# Altium PCB PCB2.PcbDoc
Units mm, origin at the board's own origin, x right, y up, seen from the top; angles counter-clockwise.
Board outline 25 x 155 mm, 2 copper layers (Top Layer, Bottom Layer); 10 components, 36 nets, 177 pads, 0 vias.
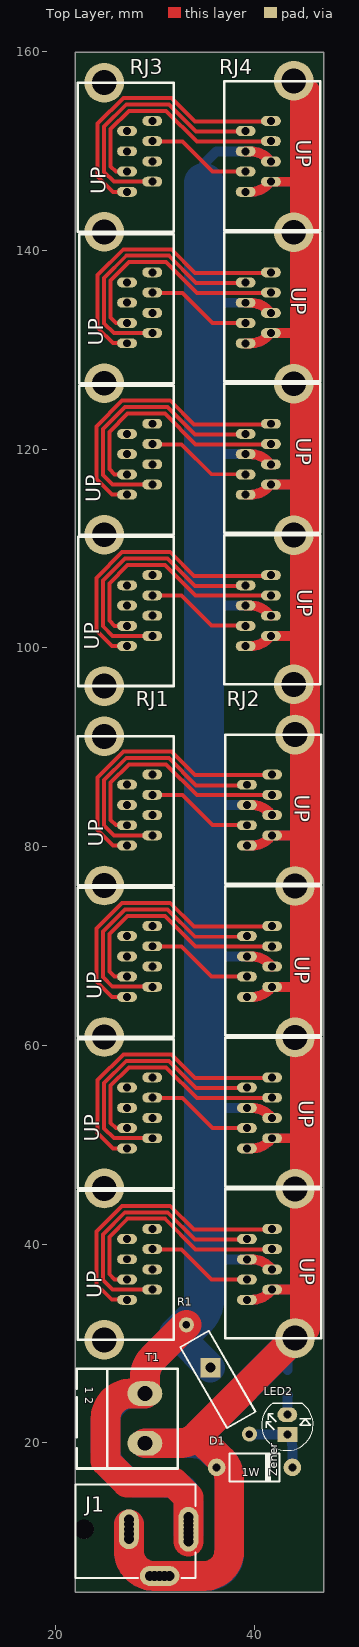
[diagram p0: Top Layer view]
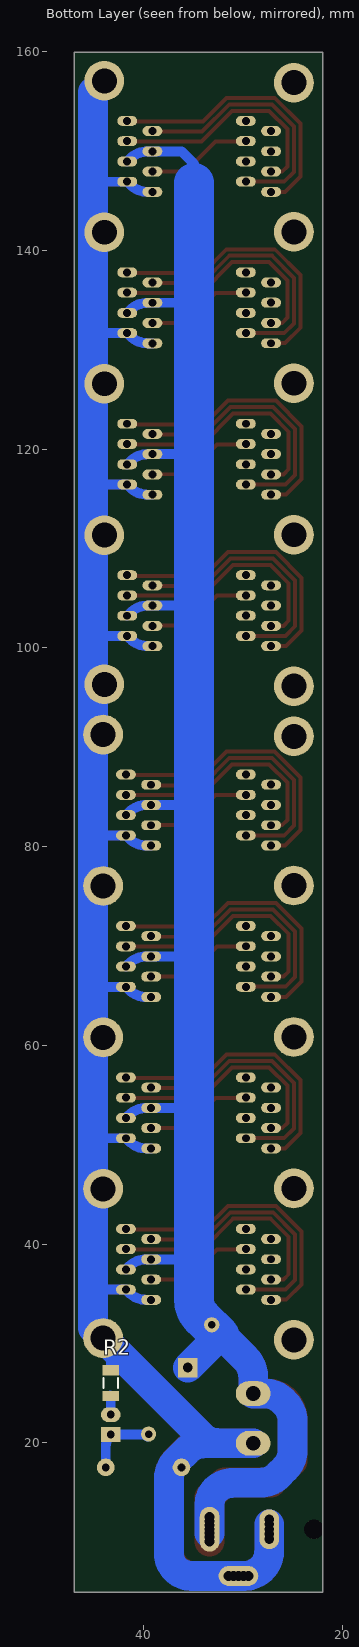
[diagram p1: Bottom Layer view, seen from below]

## Layer stack, top to bottom
Top Solder: solder mask 0.0102, Solder Resist, Dk 3.5
Top Layer: signal copper 0.0356
Dielectric 1: dielectric 0.32, FR-4, Dk 4.8
Bottom Layer: signal copper 0.0356
Bottom Solder: solder mask 0.0102, Solder Resist, Dk 3.5

## Board outline
21.99,4.95 21.99,159.95 46.99,159.95 46.99,4.95

## Design rules (kind name [scope] priority, off if disabled: settings)
Clearance [All] p1: gap=0.25 ignorepadtopadclearanceinfootprint=FALSE
PolygonConnect [All] p1: connectstyle=Relief reliefconductorwidth=0.4 reliefentries=4 polygonreliefangle="90 Angle" airgapwidth=0.254
RoutingVias [All] p1: holewidth=0.711 width=1.27 viastyle="Through Hole" minholewidth=0.711 minwidth=1.27 maxholewidth=0.711 maxwidth=1.27
SolderMaskExpansion [All] p1: expansion=0.102
Width [All] p1: maxlimit=4 minlimit=0.254 preferedwidth=1.5
30 further rules are at their usual default settings.

## Components (designator, comment, footprint, x,y, rotation, side; value= is the part's Value field where it differs from the comment)
D1 "Diode Zener" "Diode 1W" 40.005,17.526 r0 top
J1 "Power Jack" "Power Jack" 18.86,11.303 r0 top locked
LED2 "Red" LED-5mm 43.31,20.828 r90 top
R1 "330R" Res-(1/2) 33.147,31.877 r300 top
R2 "330R" "RES 1206 (3216X08L)" 43.31,27.308 r270 bottom
RJ1 "" rj45-w57-4 27.178,34.393 r90 top locked
RJ2 "" rj45-w57-4 41.783,87.249 r270 top locked
RJ3 "" rj45-w57-4 27.178,100.179 r90 top
RJ4 "" rj45-w57-4 41.656,153.035 r270 top
T1 "Phoenix terminal" "phoenix terminal 2" 17.291,27.448 r270 top

## Footprints (in the part's own frame and the unit in brackets; to place one, negate y for a bottom-side part, rotate by r counter-clockwise, add the part's x,y. Pads: shape width x height; smd on the part's side, far side on the other; paste and mask are expansions set on the pad)
"Diode 1W" [mil]
  round 70 hole 31.5: 1(-150,0) 2(150,0)
  silkscreen extent -100,-55 100,55, body extent -166,-52 165,52, height 131
LED-5mm [mm]
  rect 1.5x2 hole 0.8: 1(0,0)
  oval 1.5x2 hole 0.8: 2(2,0)
  silkscreen extent -1.6,-2.6 3.13,2.6
"phoenix terminal 2" [mm] "2 terminals"
  oval 2.5x3.5 hole 1.5: 1(2.493,11.684) 2(7.493,11.684)
  silkscreen extent 0,4.81 10.03,15
"Power Jack" [mm] "Power Adaptor Jack"
  round 1.5 hole 1: 1(14.5,-1.25) 1(14.5,-0.8) 1(14.5,-0.4) 1(14.5,0.4) 1(14.5,0.8) 1(14.5,1.25) 2(8.5,-1) 2(8.5,1) 2(8.5,-0.5) 2(8.5,0.5) 3(10.6,-4.7) 3(11.1,-4.7) 3(12.1,-4.7) 3(12.6,-4.7)
  oval 2x4.5 hole 1: 1(14.5,0)
  oval 2x4 hole 1: 2(8.5,0)
  oval 4x2 hole 1: 3(11.6,-4.7)
  round 1.9 hole 2: MH(4,0)
  silkscreen extent 3.11,-4.9 15.2,4.5, body extent 0,-4.9 15.2,4.5, height 11
"RES 1206 (3216X08L)" [mm] "Chip Resistor, 2-Leads, Body 3.2x1.6mm, IPC High Density _ (0.125 W)"
  rect 1.05x1.7 smd: 1(0,0) 2(2.596,0)
  silkscreen extent 0.8,-0.75 1.8,0.75, body extent -0.23,-0.76 2.82,0.76, height 0.6
Res-(1/2) [mil]
  round 60 hole 30: 1(0,0) 2(500,0)
  silkscreen extent 65,-65 435,65, body extent -12,-66 513,66, height 136
rj45-w57-4 [mm]
  oval 1x2 hole 0.8: 1(0,0) 2(1.02,-2.54) 3(2.04,0) 4(3.06,-2.54) 5(4.08,0) 6(5.1,-2.54) 7(6.12,0) 8(7.14,-2.54) 9(15.24,0) 10(16.26,-2.54) 11(17.28,0) 12(18.3,-2.54) 13(19.32,0) 14(20.34,-2.54) 15(21.36,0) 16(22.38,-2.54) 17(30.48,0) 18(31.5,-2.54) 19(32.52,0) 20(33.54,-2.54) 21(34.56,0) 22(35.58,-2.54) 23(36.6,0) 24(37.62,-2.54) 25(45.72,0) 26(46.74,-2.54) 27(47.76,0) 28(48.78,-2.54) 29(49.8,0) 30(50.82,-2.54) 31(51.84,0) 32(52.86,-2.54)
  round 4 hole 2.5: 33(-4.03,2.3) 34(11.21,2.3) 35(26.45,2.3) 36(41.69,2.3) 37(56.706,2.3)
  silkscreen extent -4.01,-4.7 56.71,4.95

## Part data
D1: "Zener Diode", Voltage=12V, Company=E.P.I.L, Design Date=2011/11/02, Designer="Saeid Jorablo"
LED2: library part LED, "LED", Adding Date=1387/12/22, Color=Red, Designer="Saeid Jorablo", Organazation=ControTec, Size="SMD 1206"
R1 R2: library part Resistor, "Resistor", Power="1/8 W", Tolerance=5%
RJ1 RJ2 RJ3 RJ4: library part RJ45-w57-4
T1: library part "Phoenix terminal 2", "Terminal 2 Pin", ComponentLinkURL=www.picpars.com, Designer="Seyed Mohsen Ghasemain", E-mail=picpars@gmail.com
J1: Adding Date=10/21/2009, Company=Personal, Designer="Saeid Jorablo", Project Name=Laser

## Free pads (board coordinates)
  rect 2x2 hole 1: 3(35.56,27.559)

## Nets (pads, with @x,y where several pads share a name; then routed paths per layer and width w, separated by ;. In a path a pad name is that pad's centre, name@x,y a point inside that pad or via, vN(x,y) a via of type N, cw(c..) or ccw(c..) an arc to the next point about the centre after c; other vN are vias at no path point)
GND: D1.1 J1.2 J1.3 R2.1 RJ2.7 RJ2.8 RJ2.15 RJ2.16 RJ2.23 RJ2.24 RJ2.31 RJ2.32 RJ2.33 RJ2.34 RJ2.35 RJ2.36 RJ2.37 RJ4.7 RJ4.8 RJ4.15 RJ4.16 RJ4.23 RJ4.24 RJ4.31 RJ4.32 RJ4.33 RJ4.34 RJ4.35 RJ4.36 RJ4.37 T1.2 | length 455.6
  Top Layer w1: RJ4.32 39.584,100.175 ccw(c39.584,102.715) 41.38,100.919 RJ4.31 44.72,101.195 ccw(c44.72,101.711) 45.085,101.346 ; RJ4.24 39.584,115.415 ccw(c39.584,117.955) 41.38,116.159 RJ4.23 45.027,116.435 ccw(c45.027,116.517) 45.085,116.459 ; RJ4.16 39.584,130.655 ccw(c39.584,133.195) 41.38,131.399 RJ4.15 45.027,131.675 ccw(c45.027,131.757) 45.085,131.699 ; RJ4.8 39.584,145.895 ccw(c39.584,148.435) 41.38,146.639 RJ4.7 45.027,146.915 ccw(c45.027,146.997) 45.085,146.939 ; RJ2.32 39.711,34.389 ccw(c39.711,36.929) 41.507,35.133 RJ2.31 44.836,35.409 cw(c44.836,35.057) 45.085,35.306 ; RJ2.24 39.711,49.629 ccw(c39.711,52.169) 41.507,50.373 RJ2.23 44.836,50.649 cw(c44.836,50.297) 45.085,50.546 ; RJ2.16 39.711,64.869 ccw(c39.711,67.409) 41.507,65.613 RJ2.15 44.836,65.889 cw(c44.836,65.537) 45.085,65.786 ; RJ2.8 39.711,80.109 ccw(c39.711,82.649) 41.507,80.853 RJ2.7 44.223,81.129 cw(c44.223,79.91) 45.085,80.772
  Top Layer w3: J1.2@27.36,11.803 27.36,10.803 27.36,9.143 ccw(c29.9,9.143) 29.9,6.603 29.96,6.603 30.46,6.603 30.96,6.603 31.46,6.603 34.925,6.603 ccw(c34.925,9.143) 37.465,9.143 37.465,16.421 ccw(c34.925,16.421) 36.721,18.217 34.239,20.699 ; T1.2 32.443,19.955 ccw(c32.443,22.495) 34.239,20.699 ; RJ4.33 45.085,155.936 45.085,146.939 45.085,131.699 45.085,116.459 45.085,101.346 45.085,80.772 45.085,65.786 45.085,50.546 45.085,35.306 45.085,31.545 RJ2.37 34.239,20.699
  Bottom Layer w1: RJ4.32 39.584,100.175 ccw(c39.584,102.715) 41.38,100.919 RJ4.31 44.982,101.195 45.085,101.092 ; RJ4.24 39.584,115.415 ccw(c39.584,117.955) 41.38,116.159 RJ4.23 45.061,116.435 45.085,116.459 ; RJ4.16 39.584,130.655 ccw(c39.584,133.195) 41.38,131.399 RJ4.15 44.934,131.675 45.085,131.826 ; RJ4.8 39.584,145.895 ccw(c39.584,148.435) 41.38,146.639 RJ4.7 45.061,146.915 45.085,146.939 ; RJ2.32 39.711,34.389 ccw(c39.711,36.929) 41.507,35.133 RJ2.31 44.728,35.409 45.085,35.052 ; RJ2.24 39.711,49.629 ccw(c39.711,52.169) 41.507,50.373 RJ2.23 45.061,50.649 45.085,50.673 ; RJ2.16 39.711,64.869 ccw(c39.711,67.409) 41.507,65.613 RJ2.15 44.728,65.889 45.085,65.532 ; RJ2.8 39.711,80.109 ccw(c39.711,82.649) 41.507,80.853 RJ2.7 44.934,81.129 45.085,81.28 ; R2.1 43.31,28.718 cw(c45.85,28.718) RJ2.37@44.054,30.514
  Bottom Layer w3: J1.2@27.36,11.803 27.36,10.803 27.36,9.143 ccw(c29.9,9.143) 29.9,6.603 29.96,6.603 30.46,6.603 30.96,6.603 31.46,6.603 35.178,6.603 ccw(c35.178,8.89) 37.465,8.89 37.465,16.363 ccw(c34.925,16.363) 36.721,18.159 35.669,19.211 ccw(c33.873,17.415) 33.873,19.955 32.443,19.955 ; T1.2 32.443,19.955 ; RJ4.33 45.085,155.936 45.085,146.939 45.085,131.826 45.085,116.459 45.085,101.092 45.085,81.28 45.085,65.532 45.085,50.673 45.085,35.052 45.085,31.545 RJ2.37 44.054,30.514 34.239,20.699 cw(c32.443,22.495) 32.443,19.955
NetD1_2: D1.2 LED2.1 R1.2 | length 7.2
  Bottom Layer w1: R1.2@39.624,20.624 cw(c40.115,20.133) 40.115,20.828 LED2.1 cw(c42.091,19.609) 43.815,19.609 D1.2
NetLED2_2: LED2.2 R2.2 | length 2
  Bottom Layer w1: LED2.2 R2.2 R2.2@43.363,24.765
RX+p1: RJ1.27 RJ2.3 | length 24
  Top Layer w0.4: RJ1.27@27.178,82.159 26.051,82.159 25.527,82.683 25.527,86.431 27.367,88.271 31.115,88.271 34.201,85.185 RJ2.3@41.04,85.185 ; RJ1.27@27.178,82.169 RJ1.27@27.959,82.169
RX+p2: RJ1.19 RJ2.11 | length 24
  Top Layer w0.4: RJ1.19@27.051,66.919 25.924,66.919 25.4,67.443 25.4,71.191 27.24,73.031 30.988,73.031 34.074,69.945 RJ2.11@40.913,69.945 ; RJ1.19@27.051,66.929 RJ1.19@27.832,66.929
RX+p3: RJ1.11 RJ2.19 | length 24
  Top Layer w0.4: RJ1.11@27.178,51.679 26.051,51.679 25.527,52.203 25.527,55.951 27.367,57.791 31.115,57.791 34.201,54.705 RJ2.19@41.04,54.705 ; RJ1.11@27.178,51.689 RJ1.11@27.959,51.689
RX+p4: RJ1.3 RJ2.27 | length 24
  Top Layer w0.4: RJ1.3@27.051,36.439 25.924,36.439 25.4,36.963 25.4,40.711 27.24,42.551 30.988,42.551 34.074,39.465 RJ2.27@40.913,39.465 ; RJ1.3@27.051,36.449 RJ1.3@27.832,36.449
RX+p5: RJ3.27 RJ4.3 | length 24
  Top Layer w0.4: RJ3.27 26.051,147.939 25.527,148.463 25.527,152.211 27.367,154.051 31.115,154.051 34.201,150.965 RJ4.3@41.04,150.965 ; RJ3.27@27.178,147.949 RJ3.27@27.959,147.949
RX+p6: RJ3.19 RJ4.11 | length 24
  Top Layer w0.4: RJ3.19@27.178,132.705 26.051,132.705 25.527,133.229 25.527,136.977 27.367,138.817 31.115,138.817 34.201,135.731 RJ4.11@41.04,135.731 ; RJ3.19@27.178,132.715 RJ3.19@27.959,132.715
RX+p7: RJ3.11 RJ4.19 | length 24
  Top Layer w0.4: RJ3.11@27.051,117.465 25.924,117.465 25.4,117.989 25.4,121.737 27.24,123.577 30.988,123.577 34.074,120.491 RJ4.19@40.913,120.491 ; RJ3.11@27.051,117.475 RJ3.11@27.832,117.475
RX+p8: RJ3.3 RJ4.27 | length 24
  Top Layer w0.4: RJ3.3@27.051,102.225 25.924,102.225 25.4,102.749 25.4,106.497 27.24,108.337 30.988,108.337 34.074,105.251 RJ4.27@40.913,105.251 ; RJ3.3@27.051,102.235 RJ3.3@27.832,102.235
RX-p1: RJ1.30 RJ2.6 | length 10.3
  Top Layer w0.4: RJ1.30@29.991,85.185 32.766,85.185 35.782,82.169 RJ2.6@39.008,82.169
RX-p2: RJ1.22 RJ2.14 | length 10.3
  Top Layer w0.4: RJ1.22@29.864,69.945 32.639,69.945 35.655,66.929 RJ2.14@38.881,66.929
RX-p3: RJ1.14 RJ2.22 | length 10.3
  Top Layer w0.4: RJ1.14@29.991,54.705 32.766,54.705 35.782,51.689 RJ2.22@39.008,51.689
RX-p4: RJ1.6 RJ2.30 | length 10.3
  Top Layer w0.4: RJ1.6@29.864,39.465 32.639,39.465 35.655,36.449 RJ2.30@38.881,36.449
RX-p5: RJ3.30 RJ4.6 | length 10.3
  Top Layer w0.4: RJ3.30@29.991,150.965 32.766,150.965 35.782,147.949 RJ4.6@39.008,147.949
RX-p6: RJ3.22 RJ4.14 | length 10.3
  Top Layer w0.4: RJ3.22@29.991,135.731 32.766,135.731 35.782,132.715 RJ4.14@39.008,132.715
RX-p7: RJ3.14 RJ4.22 | length 10.3
  Top Layer w0.4: RJ3.14@29.864,120.491 32.639,120.491 35.655,117.475 RJ4.22@38.881,117.475
RX-p8: RJ3.6 RJ4.30 | length 10.3
  Top Layer w0.4: RJ3.6@29.864,105.251 32.639,105.251 35.655,102.235 RJ4.30@38.881,102.235
TX+p1: RJ1.25 RJ2.1 | length 28.5
  Top Layer w0.4: RJ1.25@27.178,80.119 25.781,80.119 24.227,81.673 24.227,86.97 26.828,89.571 31.653,89.571 34.039,87.185 RJ2.1@41.04,87.185 ; RJ1.25@27.196,80.169 RJ1.25@27.959,80.169
TX+p2: RJ1.17 RJ2.9 | length 28.5
  Top Layer w0.4: RJ1.17@27.051,64.879 25.654,64.879 24.1,66.433 24.1,71.749 26.682,74.331 31.526,74.331 33.912,71.945 RJ2.9@40.913,71.945 ; RJ1.17@27.069,64.929 RJ1.17@27.832,64.929
TX+p3: RJ1.9 RJ2.17 | length 28.5
  Top Layer w0.4: RJ1.9@27.178,49.639 25.781,49.639 24.227,51.193 24.227,56.509 26.809,59.091 31.653,59.091 34.039,56.705 RJ2.17@41.04,56.705 ; RJ1.9@27.196,49.689 RJ1.9@27.959,49.689
TX+p4: RJ1.1 RJ2.25 | length 28.5
  Top Layer w0.4: RJ1.1@27.051,34.399 25.654,34.399 24.1,35.953 24.1,41.269 26.682,43.851 31.526,43.851 33.912,41.465 RJ2.25@40.913,41.465 ; RJ1.1@27.069,34.449 RJ1.1@27.832,34.449
TX+p5: RJ3.25 RJ4.1 | length 28.5
  Top Layer w0.4: RJ3.25 25.781,145.899 24.227,147.453 24.227,152.769 26.809,155.351 31.653,155.351 34.039,152.965 RJ4.1@41.04,152.965 ; RJ3.25@27.196,145.949 RJ3.25@27.959,145.949
TX+p6: RJ3.17 RJ4.9 | length 28.5
  Top Layer w0.4: RJ3.17@27.178,130.665 25.781,130.665 24.227,132.219 24.227,137.535 26.809,140.117 31.653,140.117 34.039,137.731 RJ4.9@41.04,137.731 ; RJ3.17@27.196,130.715 RJ3.17@27.959,130.715
TX+p7: RJ3.9 RJ4.17 | length 28.5
  Top Layer w0.4: RJ3.9@27.051,115.425 25.654,115.425 24.1,116.979 24.1,122.295 26.682,124.877 31.526,124.877 33.912,122.491 RJ4.17@40.913,122.491 ; RJ3.9@27.069,115.475 RJ3.9@27.832,115.475
TX+p8: RJ3.1 RJ4.25 | length 28.5
  Top Layer w0.4: RJ3.1@27.051,100.185 25.654,100.185 24.1,101.739 24.1,107.055 26.682,109.637 31.526,109.637 33.912,107.251 RJ4.25@40.913,107.251 ; RJ3.1@27.069,100.235 RJ3.1@27.832,100.235
TX-p1: RJ1.26 RJ2.2 | length 26.3
  Top Layer w0.4: RJ1.26@29.718,81.139 25.851,81.139 24.877,82.113 24.877,86.701 27.097,88.921 31.384,88.921 34.136,86.169 RJ2.2@39.008,86.169 ; RJ1.26@29.718,81.219 29.957,81.219 RJ1.26@29.991,81.185
TX-p2: RJ1.18 RJ2.10 | length 26.3
  Top Layer w0.4: RJ1.18@29.591,65.899 25.724,65.899 24.75,66.873 24.75,71.461 26.97,73.681 31.257,73.681 34.009,70.929 RJ2.10@38.881,70.929 ; RJ1.18@29.591,65.979 29.83,65.979 RJ1.18@29.864,65.945
TX-p3: RJ1.10 RJ2.18 | length 26.3
  Top Layer w0.4: RJ1.10@29.718,50.659 25.851,50.659 24.877,51.633 24.877,56.221 27.097,58.441 31.384,58.441 34.136,55.689 RJ2.18@39.008,55.689 ; RJ1.10@29.718,50.739 29.957,50.739 RJ1.10@29.991,50.705
TX-p4: RJ1.2 RJ2.26 | length 26.3
  Top Layer w0.4: RJ1.2@29.591,35.419 25.724,35.419 24.75,36.393 24.75,40.981 26.97,43.201 31.257,43.201 34.009,40.449 RJ2.26@38.881,40.449 ; RJ1.2@29.591,35.499 29.83,35.499 RJ1.2@29.864,35.465
TX-p5: RJ3.26 RJ4.2 | length 26.3
  Top Layer w0.4: RJ3.26 25.851,146.919 24.877,147.893 24.877,152.481 27.097,154.701 31.384,154.701 34.136,151.949 RJ4.2@39.008,151.949 ; RJ3.26@29.718,146.999 29.957,146.999 RJ3.26@29.991,146.965
TX-p6: RJ3.18 RJ4.10 | length 26.3
  Top Layer w0.4: RJ3.18@29.718,131.685 25.851,131.685 24.877,132.659 24.877,137.247 27.097,139.467 31.384,139.467 34.136,136.715 RJ4.10@39.008,136.715 ; RJ3.18@29.718,131.765 29.957,131.765 RJ3.18@29.991,131.731
TX-p7: RJ3.10 RJ4.18 | length 26.3
  Top Layer w0.4: RJ3.10@29.591,116.445 25.724,116.445 24.75,117.419 24.75,122.007 26.97,124.227 31.257,124.227 34.009,121.475 RJ4.18@38.881,121.475 ; RJ3.10@29.591,116.525 29.83,116.525 RJ3.10@29.864,116.491
TX-p8: RJ3.2 RJ4.26 | length 26.3
  Top Layer w0.4: RJ3.2@29.591,101.205 25.724,101.205 24.75,102.179 24.75,106.767 26.97,108.987 31.257,108.987 34.009,106.235 RJ4.26@38.881,106.235 ; RJ3.2@29.591,101.285 29.83,101.285 RJ3.2@29.864,101.251
VCC: J1.1 pad.3 R1.1 RJ2.4 RJ2.5 RJ2.12 RJ2.13 RJ2.20 RJ2.21 RJ2.28 RJ2.29 RJ4.4 RJ4.5 RJ4.12 RJ4.13 RJ4.20 RJ4.21 RJ4.28 RJ4.29 T1.1 | length 271.2
  Top Layer w1: RJ4.28 39.584,104.255 cw(c39.584,101.715) 41.38,103.511 RJ4.29 ; RJ4.20 39.584,119.495 cw(c39.584,116.955) 41.38,118.751 RJ4.21 ; RJ4.12 39.584,134.735 cw(c39.584,132.195) 41.38,133.991 RJ4.13 ; RJ4.4 39.584,149.975 cw(c39.584,147.435) 41.38,149.231 RJ4.5 ; RJ2.28 39.711,38.469 cw(c39.711,35.929) 41.507,37.725 RJ2.29 ; RJ2.20 39.711,53.709 cw(c39.711,51.169) 41.507,52.965 RJ2.21 ; RJ2.12 39.711,68.949 cw(c39.711,66.409) 41.507,68.205 RJ2.13 ; RJ2.4 39.711,84.189 cw(c39.711,81.649) 41.507,83.445 RJ2.5
  Top Layer w3: R1.1 29.719,28.449 ccw(c31.515,26.653) 28.975,26.653 T1.1 27.559,24.955 ccw(c27.559,22.415) 25.019,22.415 25.019,18.161 27.178,16.002 31.877,16.002 33.36,14.519 33.36,12.553 33.36,12.103 33.36,11.703 33.36,11.303 33.36,10.903 33.36,10.503 J1.1@33.36,10.053
  Bottom Layer w1: 34.925,38.608 35.064,38.469 RJ2.28 39.711,38.469 cw(c39.711,35.929) 41.507,37.725 RJ2.29 ; 34.925,53.467 35.167,53.709 RJ2.20 39.711,53.709 cw(c39.711,51.169) 41.507,52.965 RJ2.21 ; 34.925,69.088 35.064,68.949 RJ2.12 39.711,68.949 cw(c39.711,66.409) 41.507,68.205 RJ2.13 ; 34.925,84.201 34.937,84.189 RJ2.4 39.711,84.189 cw(c39.711,81.649) 41.507,83.445 RJ2.5 ; 34.925,104.267 34.937,104.255 RJ4.28 39.584,104.255 cw(c39.584,101.715) 41.38,103.511 RJ4.29 ; 34.925,119.253 35.167,119.495 RJ4.20 39.584,119.495 cw(c39.584,116.955) 41.38,118.751 RJ4.21 ; 34.925,134.493 35.167,134.735 RJ4.12 39.584,134.735 cw(c39.584,132.195) 41.38,133.991 RJ4.13 ; 34.925,146.812 34.925,148.717 36.183,149.975 RJ4.4 39.584,149.975 cw(c39.584,147.435) 41.38,149.231 RJ4.5
  Bottom Layer w3: 32.348,30.771 pad.3 ; J1.1@33.36,10.903 33.36,11.303 33.36,11.703 33.36,12.103 33.36,12.553 33.36,13.811 ccw(c31.345,13.811) 32.77,15.236 ccw(c30.974,13.44) 30.974,15.98 28.252,15.98 cw(c28.252,18.52) 26.456,16.724 25.763,17.417 cw(c27.559,19.213) 25.019,19.213 25.019,22.189 cw(c27.559,22.189) 25.763,23.985 25.989,24.211 cw(c27.785,22.415) 27.785,24.955 T1.1 28.975,26.653 cw(c31.515,26.653) 29.719,28.449 R1.1 34.181,32.911 ccw(c32.385,34.707) 34.925,34.707
  Bottom Layer w4: 32.348,30.771 34.181,32.604 ccw(c32.385,34.401) 34.925,34.401 34.925,34.707 34.925,38.608 34.925,53.467 34.925,69.088 34.925,84.201 34.925,104.267 34.925,119.253 34.925,134.493 34.925,146.812
pads on no net: J1.MH RJ1.4 RJ1.5 RJ1.7 RJ1.8 RJ1.12 RJ1.13 RJ1.15 RJ1.16 RJ1.20 RJ1.21 RJ1.23 RJ1.24 RJ1.28 RJ1.29 RJ1.31 RJ1.32 RJ1.33 RJ1.34 RJ1.35 RJ1.36 RJ1.37 RJ3.4 RJ3.5 RJ3.7 RJ3.8 RJ3.12 RJ3.13 RJ3.15 RJ3.16 RJ3.20 RJ3.21 RJ3.23 RJ3.24 RJ3.28 RJ3.29 RJ3.31 RJ3.32 RJ3.33 RJ3.34 RJ3.35 RJ3.36 RJ3.37

## Silkscreen, mask and mechanical layers (free items; w line width, h text height)
Mechanical 1:
  the board outline again, w0.254

## Text inside footprints (layer, text, board x,y; h text height)
D1: Top Overlay "Zener" at 42.291,16.637 h0.8 r90; Top Overlay "1W" at 38.735,16.637 h0.8
RJ1: Top Overlay "UP" at 24.638,34.544 h1.52 r90; Top Overlay "UP" at 24.384,50.292 h1.52 r90; Top Overlay "UP" at 24.638,64.643 h1.52 r90; Top Overlay "UP" at 24.765,80.01 h1.52 r90
RJ2: Top Overlay "UP" at 44.577,38.608 h1.52 r270; Top Overlay "UP" at 44.45,54.483 h1.52 r270; Top Overlay "UP" at 44.069,68.961 h1.52 r270; Top Overlay "UP" at 44.069,85.217 h1.52 r270
RJ3: Top Overlay "UP" at 24.384,99.822 h1.52 r90; Top Overlay "UP" at 24.511,114.681 h1.52 r90; Top Overlay "UP" at 24.765,130.429 h1.52 r90; Top Overlay "UP" at 25.019,145.669 h1.52 r90
RJ4: Top Overlay "UP" at 44.196,151.13 h1.52 r270; Top Overlay "UP" at 43.688,136.271 h1.52 r270; Top Overlay "UP" at 44.196,121.158 h1.52 r270; Top Overlay "UP" at 44.323,105.918 h1.52 r270
T1: Top Overlay "1 2" at 22.987,25.654 h0.8 r270